# Altium PCB PCB_MyFirstCPU_2022-09-18.pcbdoc (part 1 of 2)
Units mil, origin at the board's own origin, x right, y up, seen from the top; angles counter-clockwise.
Board outline 4755 x 3745 mil, 2 copper layers (Top Layer, Bottom Layer); 117 components, 142 nets, 496 pads, 228 vias.
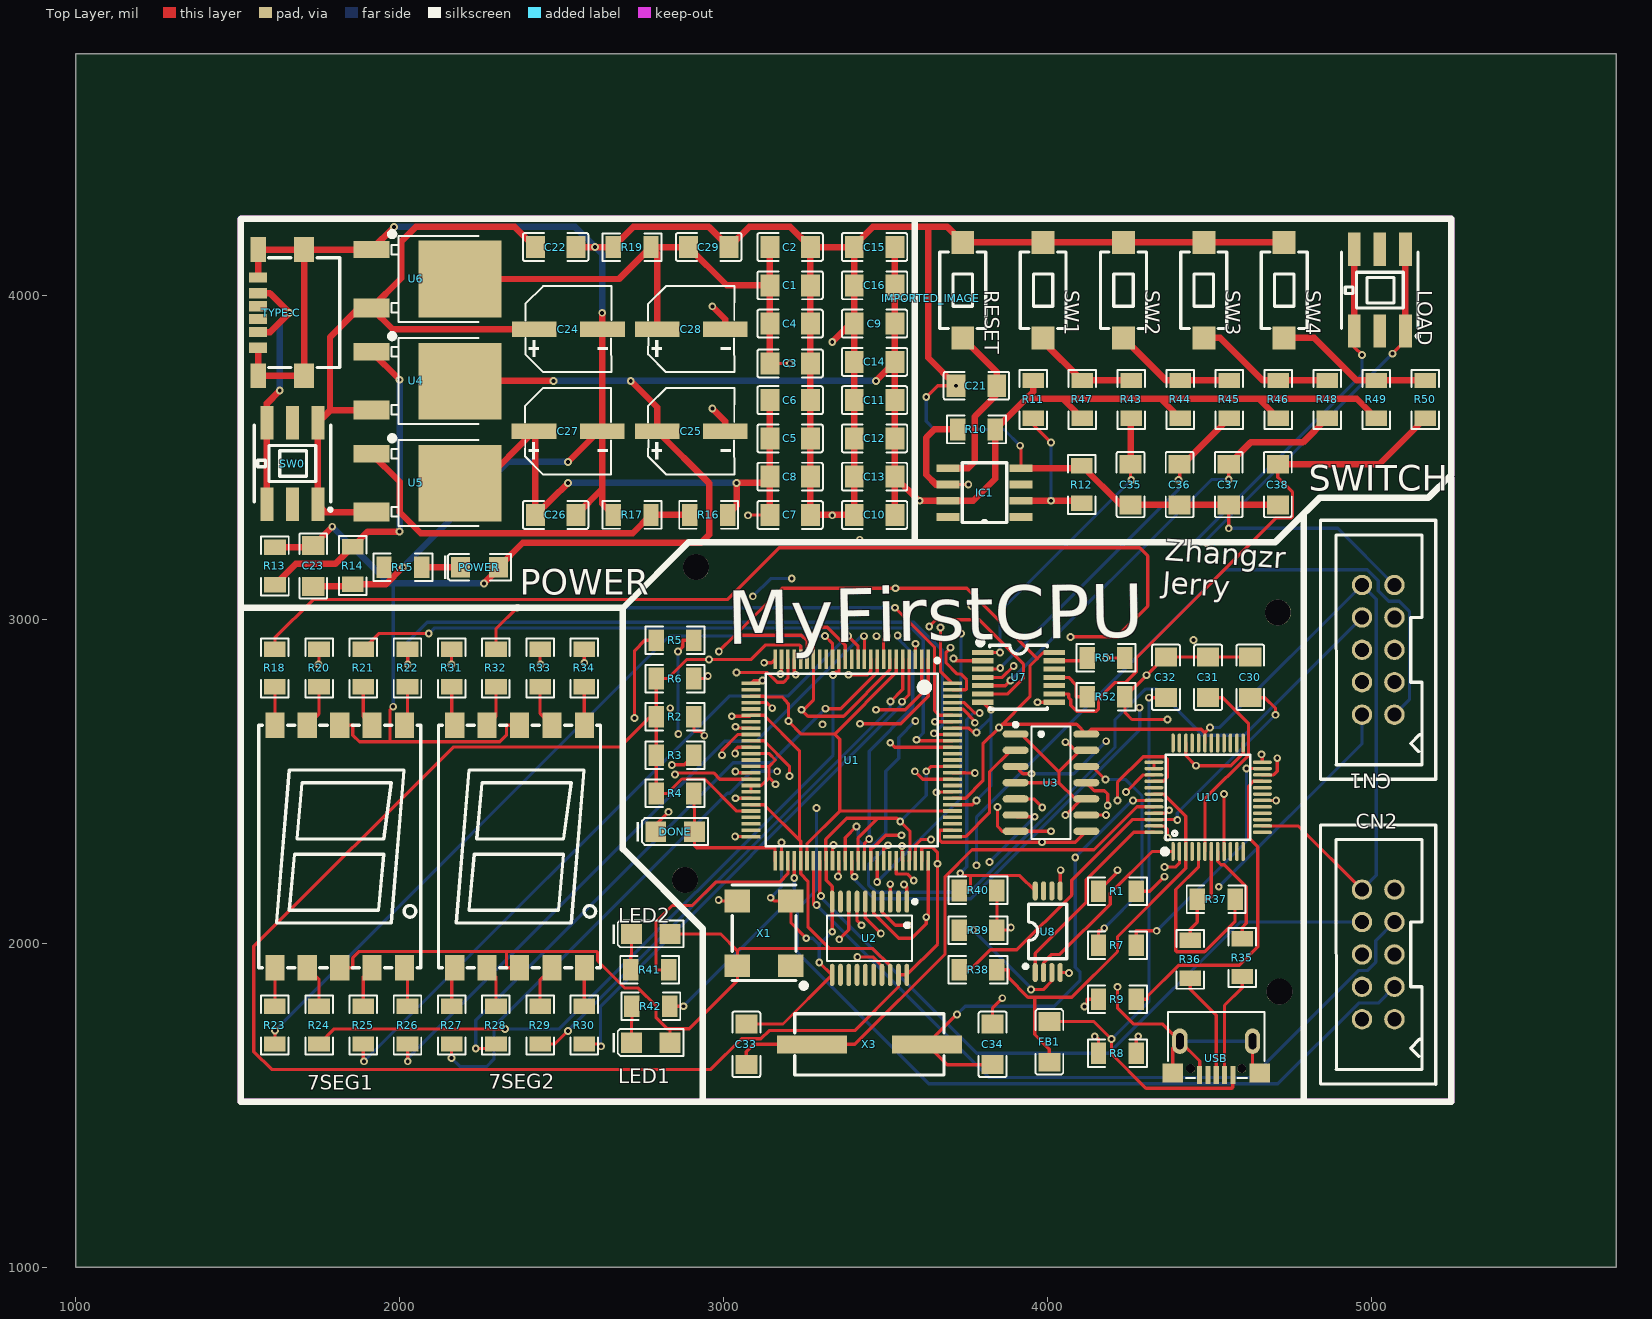
[diagram p0: Top Layer view]
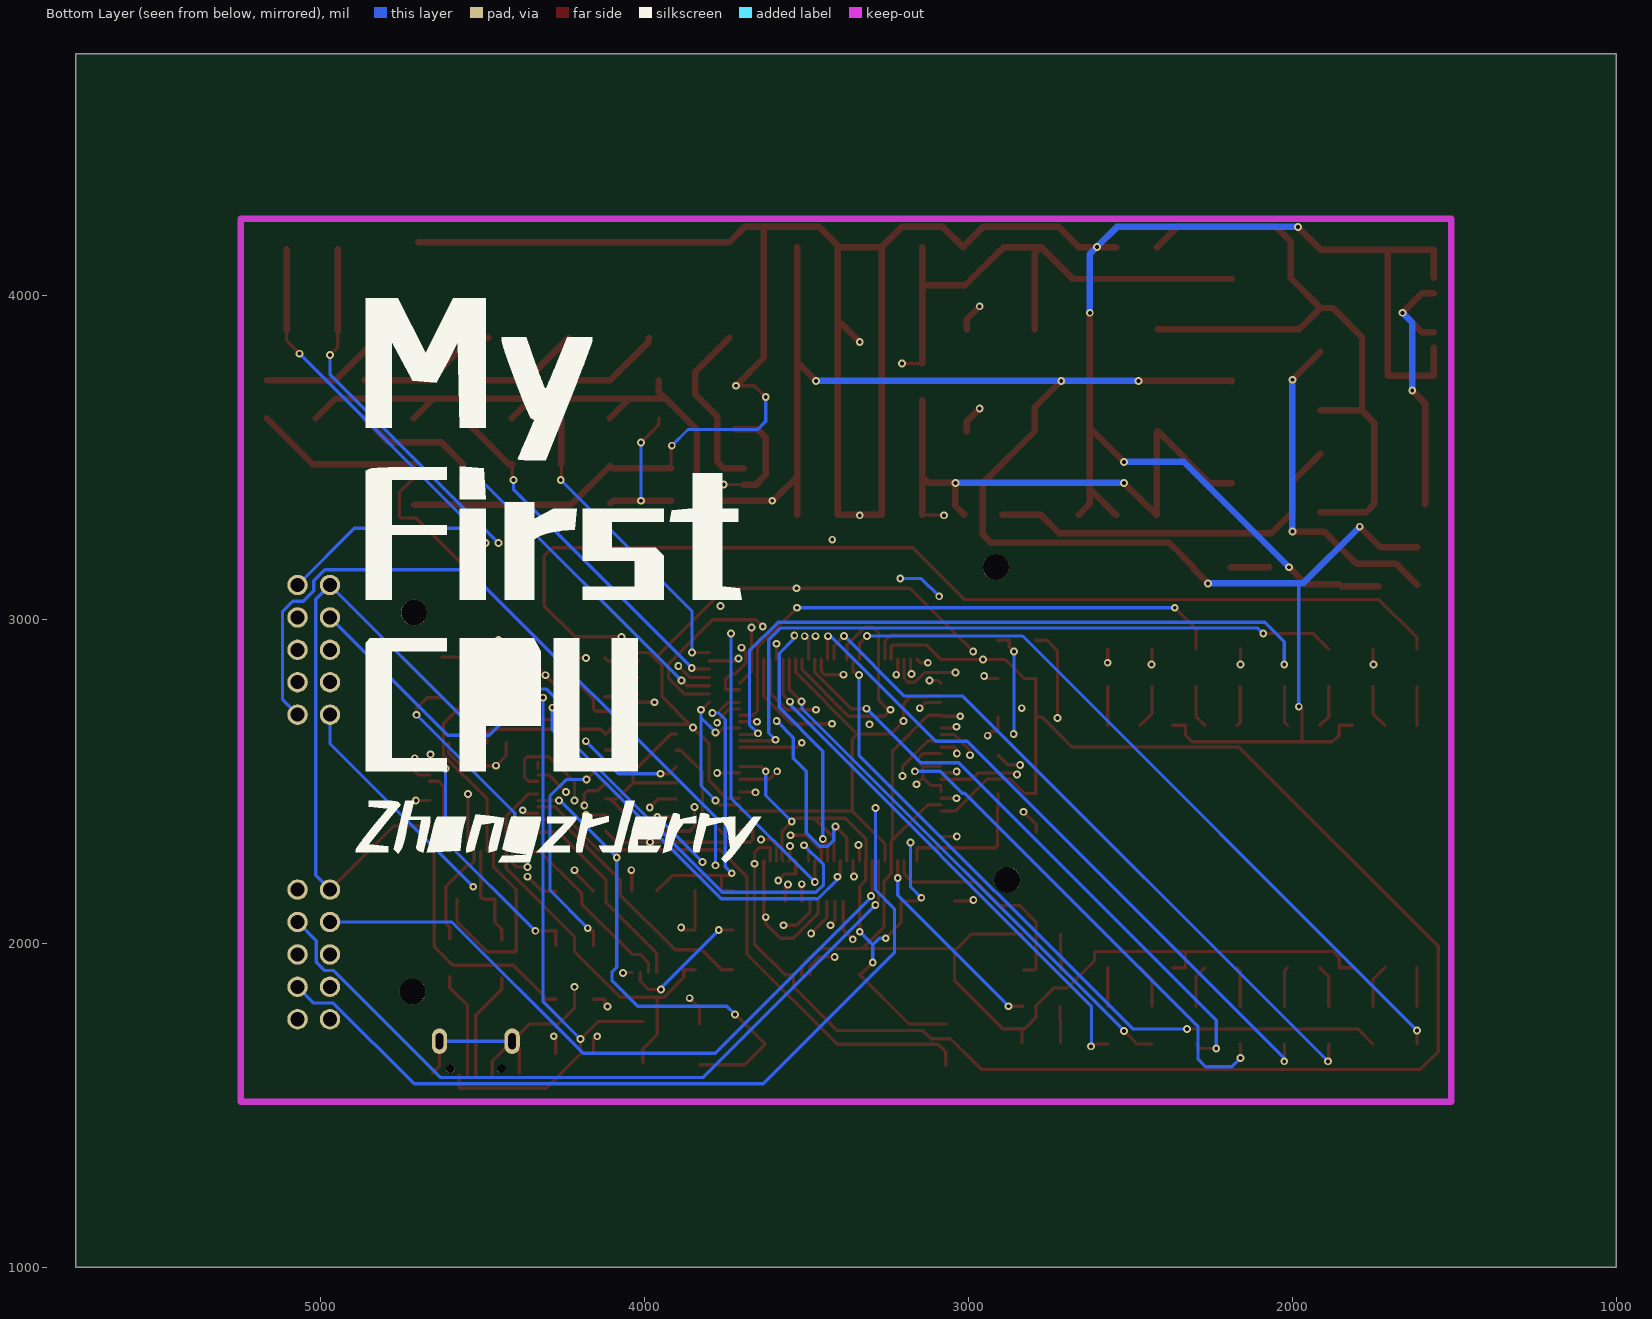
[diagram p1: Bottom Layer view, seen from below]

## Layer stack, top to bottom
Top Layer: signal copper (thickness not stored)
Dielectric: dielectric 12.6, FR-4, Dk 4.8
Bottom Layer: signal copper (thickness not stored)

## Board outline
5755,1000 1000,1000 1000,4745 5755,4745

## Components (designator, comment, footprint, x,y, rotation, side; value= is the part's Value field where it differs from the comment)
7SEG1 "SLS0561FR1A1BD" LED-SEG-SMD_SLS0561FR1A1BD 1815,2297.97 r0 top
7SEG2 "SLS0561FR1A1BD" LED-SEG-SMD_SLS0561FR1A1BD 2370,2297.95 r0 top
C1 "100nF" C1206 3205,4029.88 r180 top
C2 "100nF" C1206 3205,4147.99 r180 top
C3 "100nF" C1206 3205,3788.66 r180 top
C4 "100nF" C1206 3205,3911.77 r180 top
C5 "100nF" C1206 3205,3557.44 r180 top
C6 "100nF" C1206 3205,3675.55 r180 top
C7 "100nF" C1206 3205,3321.22 r180 top
C8 "100nF" C1206 3205,3439.33 r180 top
C9 "100nF" C1206 3465.63,3911.76 r0 top
C10 "100nF" C1206 3465.63,3321.21 r0 top
C11 "100nF" C1206 3465.63,3675.54 r0 top
C12 "100nF" C1206 3465.63,3557.43 r0 top
C13 "100nF" C1206 3465.63,3439.32 r0 top
C14 "100nF" C1206 3465.63,3793.65 r0 top
C15 "100nF" C1206 3465.63,4147.98 r0 top
C16 "100nF" C1206 3465.63,4029.87 r0 top
C21 "1uF" C1206 3780,3720 r0 top
C22 "100nF" C1206 2481.38,4147.99 r180 top
C23 "100nF" C1206 1733.35,3163.74 r90 top
C24 "100uF" CAP-SMD_BD6.3-L6.6-W6.6-LS7.2-FD 2520.75,3894.61 r0 top
C25 "100uF" CAP-SMD_BD6.3-L6.6-W6.6-LS7.2-FD 2900,3579.64 r0 top
C26 "100nF" C1206 2481.38,3321.22 r180 top
C27 "100uF" CAP-SMD_BD6.3-L6.6-W6.6-LS7.2-FD 2520,3579.64 r0 top
C28 "100uF" CAP-SMD_BD6.3-L6.6-W6.6-LS7.2-FD 2900,3894.61 r0 top
C29 "100nF" C1206 2953.82,4147.99 r180 top
C30 "100nF" C1206 4625,2820 r90 top
C31 "33nF" C1206 4495,2820 r270 top
C32 "10nF" C1206 4365,2820 r270 top
C33 "20pF" C1206 3070,1687.5 r270 top
C34 "20pF" C1206 3830,1687.5 r270 top
C35 "1uF" C1206 4255.85,3415 r90 top
C36 "1uF" C1206 4407.23,3415 r90 top
C37 "1uF" C1206 4558.61,3415 r90 top
C38 "1uF" C1206 4710,3415 r90 top
CN1 "Z-231011810106" IDC-TH_Z-231011810106 5020,2905 r90 top
CN2 "Z-231011810106" IDC-TH_Z-231011810106 5020,1965 r90 top
DONE "TZ-P2-1206YTCS2-0.9T" LED1206-RD_YELLOW-1 2850,2343.78 r0 top
FB1 "PZ3216U601-1R5TF" L1206 4005,1695 r270 top
IC1 "UNIT_M51957B" SMD_SOP8 3805,3390 r180 top
IMPORTED_IMAGE "IMPORTED_IMAGE" IMPORTED_IMAGE 3638.72,3990 r0 top
LED1 "E6C1206CWAY1UDA" LED1206-RD_WHITE 2775,1693.06 r0 top
LED2 "E6C1206CWAY1UDA" LED1206-RD_WHITE 2775,2028.06 r0 top
LOAD "XKB5858-Z-TP" SW-SMD_6P-L5.8-W5.8-P2.00-LS8.3 5025,4015 r270 top
POWER "E6C1206QBAC1UDA" LED1206-R-RD 2246.22,3160 r0 top
R1 "4.7kΩ" R1206 4215,2160 r0 top
R2 "4.7kΩ" R1206 2850,2698.11 r180 top
R3 "4.7kΩ" R1206 2850,2580 r180 top
R4 "330Ω" R1206 2850,2461.89 r0 top
R5 "100Ω" R1206 2850,2934.33 r0 top
R6 "4.7kΩ" R1206 2850,2816.22 r180 top
R7 "100Ω" R1206 4215,1993.33 r0 top
R8 "100Ω" R1206 4215,1660 r0 top
R9 "100Ω" R1206 4215,1826.67 r180 top
R10 "1kΩ" R1206 3780,3585 r0 top
R11 "10kΩ" R1206 3955,3677.99 r90 top
R12 "7.5kΩ" R1206 4105,3415 r270 top
R13 "240Ω" R1206 1615.24,3163.74 r270 top
R14 "390Ω" R1206 1855,3165 r90 top
R15 "330Ω" R1206 2010,3160 r0 top
R16 "240Ω" R1206 2953.82,3321.22 r180 top
R17 "240Ω" R1206 2717.6,3321.22 r0 top
R18 "100Ω" R1206 1615,2849.14 r90 top
R19 "240Ω" R1206 2717.6,4147.99 r180 top
R20 "100Ω" R1206 1751.43,2849.14 r90 top
R21 "100Ω" R1206 1887.86,2849.14 r90 top
R22 "100Ω" R1206 2024.29,2849.14 r90 top
R23 "100Ω" R1206 1615,1746.78 r90 top
R24 "100Ω" R1206 1751.43,1746.78 r90 top
R25 "100Ω" R1206 1887.86,1746.78 r90 top
R26 "100Ω" R1206 2024.29,1746.78 r90 top
R27 "100Ω" R1206 2160.71,1746.78 r90 top
R28 "100Ω" R1206 2297.14,1746.78 r90 top
R29 "100Ω" R1206 2433.57,1746.78 r90 top
R30 "100Ω" R1206 2570,1746.78 r90 top
R31 "100Ω" R1206 2160.71,2849.14 r90 top
R32 "100Ω" R1206 2297.14,2849.14 r90 top
R33 "100Ω" R1206 2433.57,2849.14 r90 top
R34 "100Ω" R1206 2570,2849.14 r90 top
R35 "33Ω" R1206 4600,1955 r90 top
R36 "33Ω" R1206 4440,1950 r90 top
R37 "1.5kΩ" R1206 4520,2135 r0 top
R38 "470Ω" R1206 3785,1917.5 r180 top
R39 "2.2kΩ" R1206 3785,2040 r180 top
R40 "10kΩ" R1206 3785,2162.5 r180 top
R41 "330Ω" R1206 2771.81,1917.3 r0 top
R42 "330Ω" R1206 2775,1805 r0 top
R43 "100Ω" R1206 4257.5,3677.99 r270 top
R44 "2.2kΩ" R1206 4408.75,3677.99 r270 top
R45 "100Ω" R1206 4560,3677.99 r270 top
R46 "2.2kΩ" R1206 4711.25,3677.99 r270 top
R47 "2.2kΩ" R1206 4106.25,3677.99 r270 top
R48 "100Ω" R1206 4862.5,3677.99 r270 top
R49 "2.2kΩ" R1206 5013.75,3677.99 r270 top
R50 "100Ω" R1206 5165,3677.99 r90 top
R51 "2.2kΩ" R1206 4180,2880 r180 top
R52 "2.2kΩ" R1206 4180,2760 r180 top
RESET "TC" KEY-SMD_L6.0-W3.6-LS8.3-L 3737.79,4015 r90 top
SW0 "XKB5858-Z-TP" SW-SMD_6P-L5.8-W5.8-P2.00-LS8.3 1669.13,3480 r270 top
SW1 "TC" KEY-SMD_L6.0-W3.6-LS8.3-L 3985.79,4015 r270 top
SW2 "TC" KEY-SMD_L6.0-W3.6-LS8.3-L 4233.78,4015 r270 top
SW3 "TC" KEY-SMD_L6.0-W3.6-LS8.3-L 4481.77,4015 r270 top
SW4 "TC" KEY-SMD_L6.0-W3.6-LS8.3-L 4729.76,4015 r90 top
TYPE-C "TYPEC-249D-BRP6" USB-C-SMD_XUNPU_TYPEC-249D-BRP6 1634.13,3945.43 r90 top
U1 "XC3S250E-4VQG100I" QFP-100_L14.0-W14.0-P0.50-LS16.0-BL 3395,2565 r180 top
U2 "XCF02SVOG20C" TSSOP-20_L6.5-W4.4-P0.65-LS6.4-BL 3450,2015 r180 top
U3 "MC74AC125DR2G" SOIC-14_L8.7-W3.9-P1.27-LS6.0-BL 4010,2495 r270 top
U4 "LM317AG-TN3-R" TO-252-2_L6.5-W6.1-P4.58-LS10.0-TL 2050,3735.04 r0 top
U5 "LM317AG-TN3-R" TO-252-2_L6.5-W6.1-P4.58-LS10.0-TL 2050,3420.08 r0 top
U6 "LM317AG-TN3-R" TO-252-2_L6.5-W6.1-P4.58-LS10.0-TL 2050,4050 r0 top
U7 "74VHC14FT" TSSOP-14_L5.0-W4.4-P0.65-LS6.4-BL 3910,2820 r270 top
U8 "AT93C46E-TH-T" TSSOP-8_L4.4-W3.0-P0.65-LS6.4-BL-2 4000,2035 r0 top
U10 "FT2232D" LQFP-48_L7.0-W7.0-P0.50-LS9.0-BL 4495,2450 r0 top
USB "U254-051N-4BH83-F1B" MICRO-USB-SMD_U254-051N-4BH83-F1B 4520,1645 r180 top
X1 "10MHz" OSC-SMD_4P-L7.0-W5.0-BL_SG7050 3125,2030 r90 top
X3 "-" CRYSTAL-SMD_L11.4-W4.8-LS12.7 3450,1687.5 r180 top

## Footprints (in the part's own frame and the unit in brackets; to place one, negate y for a bottom-side part, rotate by r counter-clockwise, add the part's x,y. Pads: shape width x height; smd on the part's side, far side on the other; paste and mask are expansions set on the pad)
C1206 [mm]
  rect 1.485x1.728 smd: 1(-1.593,0) 2(1.593,0)
  silkscreen extent -2.56,-1.09 2.56,1.09
CAP-SMD_BD6.3-L6.6-W6.6-LS7.2-FD [mm]
  rect 3.5x1.2 smd: 1(-2.67,0) 2(2.67,0)
  silkscreen extent -3.38,-3.38 3.38,3.38
CRYSTAL-SMD_L11.4-W4.8-LS12.7 [mm]
  rect 5.5x1.4 smd: 1(-4.5,0) 2(4.5,0)
  silkscreen extent -5.85,-2.4 5.85,2.4
IDC-TH_Z-231011810106 [mm]
  round 1.6 hole 1.1: 1(-5.08,-1.27) 2(-5.08,1.27) 3(-2.54,-1.27) 4(-2.54,1.27) 5(0,-1.27) 6(0,1.27) 7(2.54,-1.27) 8(2.54,1.27) 9(5.08,-1.27) 10(5.08,1.27)
  silkscreen extent -10.17,-4.5 10.15,4.52
IMPORTED_IMAGE [mil]
KEY-SMD_L6.0-W3.6-LS8.3-L [mm]
  rect 1.8x1.8 smd: 1(-3.75,0) 2(3.75,0)
  silkscreen extent -3,-1.8 3,1.8
L1206 [mm]
  rect 1.485x1.728 smd: 1(-1.593,0) 2(1.593,0)
  silkscreen extent -2.56,-1.09 2.56,1.09
LED1206-R-RD [mm]
  rect 1.485x1.62 smd: 1(1.493,0) 2(-1.492,0)
  silkscreen extent -2.77,-1.04 2.46,1.04
LED1206-RD_WHITE [mm]
  rect 1.635x1.6 smd: 1(-1.517,0) 2(1.517,0)
  silkscreen extent -2.99,-1.04 2.57,1.07
LED1206-RD_YELLOW-1 [mm]
  rect 1.635x1.6 smd: 1(-1.517,0) 2(1.517,0)
  silkscreen extent -2.99,-1.04 2.57,1.07
LED-SEG-SMD_SLS0561FR1A1BD [mm]
  rect 1.5x2 smd: 1(-5.08,-9.5) 2(-2.54,-9.5) 3(0,-9.5) 4(2.54,-9.5) 5(5.08,-9.5) 6(5.08,9.5) 7(2.54,9.5) 8(0,9.5) 9(-2.54,9.5) 10(-5.08,9.5)
  silkscreen extent -6.35,-9.5 6.35,9.5
LQFP-48_L7.0-W7.0-P0.50-LS9.0-BL [mm]
  oval 0.27x1.5 smd: 1(-2.75,-4.25) 2(-2.25,-4.25) 3(-1.75,-4.25) 4(-1.25,-4.25) 5(-0.75,-4.25) 6(-0.25,-4.25) 7(0.25,-4.25) 8(0.75,-4.25) 9(1.25,-4.25) 10(1.75,-4.25) 11(2.25,-4.25) 12(2.75,-4.25) 25(2.75,4.25) 26(2.25,4.25) 27(1.75,4.25) 28(1.25,4.25) 29(0.75,4.25) 30(0.25,4.25) 31(-0.25,4.25) 32(-0.75,4.25) 33(-1.25,4.25) 34(-1.75,4.25) 35(-2.25,4.25) 36(-2.75,4.25)
  oval 1.5x0.27 smd: 13(4.25,-2.75) 14(4.25,-2.25) 15(4.25,-1.75) 16(4.25,-1.25) 17(4.25,-0.75) 18(4.25,-0.25) 19(4.25,0.25) 20(4.25,0.75) 21(4.25,1.25) 22(4.25,1.75) 23(4.25,2.25) 24(4.25,2.75) 37(-4.25,2.75) 38(-4.25,2.25) 39(-4.25,1.75) 40(-4.25,1.25) 41(-4.25,0.75) 42(-4.25,0.25) 43(-4.25,-0.25) 44(-4.25,-0.75) 45(-4.25,-1.25) 46(-4.25,-1.75) 47(-4.25,-2.25) 48(-4.25,-2.75)
  silkscreen extent -3.59,-4.46 3.3,3.34
MICRO-USB-SMD_U254-051N-4BH83-F1B [mm]
  rect 1.6x1.5 smd: 0(-3.4,1.175) 0(3.4,1.175)
  oval 1.2x2 hole 0.6 slot 1.25 at 90 deg: 0(-2.85,-1.325) 0(2.85,-1.325)
  rect 0.4x1.4 smd: 1(-1.3,1.325) 2(-0.65,1.325) 3(0,1.325) 4(0.65,1.325) 5(1.3,1.325)
  round 0.7 hole 0.7 unplated: ""(-2,0.825) ""(2,0.825)
  silkscreen extent -3.8,-3.61 3.79,1.57
OSC-SMD_4P-L7.0-W5.0-BL_SG7050 [mm]
  rect 1.8x2 smd: 1(-2.54,-2.1) 2(2.54,-2.1) 3(2.54,2.1) 4(-2.54,2.1)
  silkscreen extent -4.3,-3.3 3.8,2.5
QFP-100_L14.0-W14.0-P0.50-LS16.0-BL [mm]
  rect 0.28x1.5 smd: 1(-6,-7.9) 2(-5.5,-7.9) 3(-5,-7.9) 4(-4.5,-7.9) 5(-4,-7.9) 6(-3.5,-7.9) 7(-3,-7.9) 8(-2.5,-7.9) 9(-2,-7.9) 10(-1.5,-7.9) 11(-1,-7.9) 12(-0.5,-7.9) 13(0,-7.9) 14(0.5,-7.9) 15(1,-7.9) 16(1.5,-7.9) 17(2,-7.9) 18(2.5,-7.9) 19(3,-7.9) 20(3.5,-7.9) 21(4,-7.9) 22(4.5,-7.9) 23(5,-7.9) 24(5.5,-7.9) 25(6,-7.9) 51(6,7.9) 52(5.5,7.9) 53(5,7.9) 54(4.5,7.9) 55(4,7.9) 56(3.5,7.9) 57(3,7.9) 58(2.5,7.9) 59(2,7.9) 60(1.5,7.9) 61(1,7.9) 62(0.5,7.9) 63(0,7.9) 64(-0.5,7.9) 65(-1,7.9) 66(-1.5,7.9) 67(-2,7.9) 68(-2.5,7.9) 69(-3,7.9) 70(-3.5,7.9) 71(-4,7.9) 72(-4.5,7.9) 73(-5,7.9) 74(-5.5,7.9) 75(-6,7.9)
  rect 1.5x0.28 smd: 26(7.9,-6) 27(7.9,-5.5) 28(7.9,-5) 29(7.9,-4.5) 30(7.9,-4) 31(7.9,-3.5) 32(7.9,-3) 33(7.9,-2.5) 34(7.9,-2) 35(7.9,-1.5) 36(7.9,-1) 37(7.9,-0.5) 38(7.9,0) 39(7.9,0.5) 40(7.9,1) 41(7.9,1.5) 42(7.9,2) 43(7.9,2.5) 44(7.9,3) 45(7.9,3.5) 46(7.9,4) 47(7.9,4.5) 48(7.9,5) 49(7.9,5.5) 50(7.9,6) 76(-7.9,6) 77(-7.9,5.5) 78(-7.9,5) 79(-7.9,4.5) 80(-7.9,4) 81(-7.9,3.5) 82(-7.9,3) 83(-7.9,2.5) 84(-7.9,2) 85(-7.9,1.5) 86(-7.9,1) 87(-7.9,0.5) 88(-7.9,0) 89(-7.9,-0.5) 90(-7.9,-1) 91(-7.9,-1.5) 92(-7.9,-2) 93(-7.9,-2.5) 94(-7.9,-3) 95(-7.9,-3.5) 96(-7.9,-4) 97(-7.9,-4.5) 98(-7.9,-5) 99(-7.9,-5.5) 100(-7.9,-6)
  silkscreen extent -6.85,-7.95 6.75,6.75
R1206 [mil]
  rect 47.54x66.97 smd: 1(-58.22,0) 2(58.22,0)
  silkscreen extent -91,-42 91,42
SMD_SOP8 [mil]
  rect 70.87x23.62 smd: 1(-112.2,75) 2(-112.2,25) 3(-112.2,-25) 4(-112.2,-75) 5(112.2,-75) 6(112.2,-25) 7(112.2,25) 8(112.2,75)
  silkscreen extent -69,-92 69,92
SOIC-14_L8.7-W3.9-P1.27-LS6.0-BL [mil]
  oval 22.6x80.24 smd: 1(-150,-109.02) 2(-100,-109.02) 3(-50,-109.02) 4(0,-109.02) 5(50,-109.02) 6(100,-109.02) 7(150,-109.02) 8(150,109.02) 9(100,109.02) 10(50,109.02) 11(0,109.02) 12(-50,109.02) 13(-100,109.02) 14(-150,109.02)
  silkscreen extent -185,-115 173,60
SW-SMD_6P-L5.8-W5.8-P2.00-LS8.3 [mm]
  rect 2.6x1 smd: 1(3.2,2) 2(3.2,0) 3(3.2,-2) 4(-3.2,2) 5(-3.2,0) 6(-3.2,-2)
  silkscreen extent -3,-3 3.74,3.11
TO-252-2_L6.5-W6.1-P4.58-LS10.0-TL [mm]
  rect 2.8x1.35 smd: 1(-3.475,2.29)
  rect 2.8x1.5 smd: 3(-3.475,-2.29)
  rect 6.5x6 smd: 4(3.475,-0.017)
  silkscreen extent -2.06,-3.39 4.9,3.7
TSSOP-8_L4.4-W3.0-P0.65-LS6.4-BL-2 [mm]
  oval 0.4x1.5 smd: 1(-0.975,-3.2) 2(-0.325,-3.2) 3(0.325,-3.2) 4(0.975,-3.2) 5(0.975,3.2) 6(0.325,3.2) 7(-0.325,3.2) 8(-0.975,3.2)
  silkscreen extent -1.89,-2.87 1.5,2.16
TSSOP-14_L5.0-W4.4-P0.65-LS6.4-BL [mm]
  rect 0.4x1.7 smd: 1(-1.95,-2.8) 2(-1.3,-2.8) 3(-0.65,-2.8) 4(0,-2.8) 5(0.65,-2.8) 6(1.3,-2.8) 7(1.95,-2.8) 8(1.95,2.8) 9(1.3,2.8) 10(0.65,2.8) 11(0,2.8) 12(-0.65,2.8) 13(-1.3,2.8) 14(-1.95,2.8)
  silkscreen extent -2.95,-3.2 2.5,2.25
TSSOP-20_L6.5-W4.4-P0.65-LS6.4-BL [mm]
  oval 0.364x1.742 smd: 1(-2.925,-2.871) 2(-2.275,-2.871) 3(-1.625,-2.871) 4(-0.975,-2.871) 5(-0.325,-2.871) 6(0.325,-2.871) 7(0.975,-2.871) 8(1.625,-2.871) 9(2.275,-2.871) 10(2.925,-2.871) 11(2.925,2.871) 12(2.275,2.871) 13(1.625,2.871) 14(0.975,2.871) 15(0.325,2.871) 16(-0.325,2.871) 17(-0.975,2.871) 18(-1.625,2.871) 19(-2.275,2.871) 20(-2.925,2.871)
  silkscreen extent -3.71,-3.02 3.33,1.77
USB-C-SMD_XUNPU_TYPEC-249D-BRP6 [mm]
  rect 1.95x1.2 smd: 7(4.945,1.8) 10(-4.945,1.8)
  rect 1.95x1.6 smd: 8(4.945,-1.8) 9(-4.945,-1.8)
  rect 0.8x1.4 smd: A5(-0.5,1.8) A9(1.52,1.8) A12(2.75,1.8) B5(0.5,1.8) B9(-1.52,1.8) B12(-2.75,1.8)
  silkscreen extent -4.3,-4.6 4.3,0.97

## Free pads (board coordinates)
  round 80 hole 80 unplated: ""(2880,2195) ""(2915,3160) ""(4710,3020) ""(4715,1850)

## Via types
v1: diameter 24, hole 12, Top Layer to Bottom Layer, tented both sides, 228 vias

## Nets (pads, with @x,y where several pads share a name; then routed paths per layer and width w, separated by ;. In a path a pad name is that pad's centre, name@x,y a point inside that pad or via, vN(x,y) a via of type N, cw(c..) or ccw(c..) an arc to the next point about the centre after c; other vN are vias at no path point)
7SEG_1_1: R23.1 U1.16 | length 2324.8
  Top Layer w10: R23.1@1615,1688.56 1615,1723.34 v1(1615,1730) ; v1(3312.7,2947.65) 3335.94,2924.41 U1.16@3335.94,2876.02
  Bottom Layer w10: v1(1615,1730) 2832.65,2947.65 v1(3312.7,2947.65)
7SEG_1_2: R24.1 U1.15 | length 2264.3
  Top Layer w10: R24.1@1751.43,1688.56 1797.87,1735 v1(2325,1735) ; v1(3337.62,2826.99) 3346.11,2835.48 3355.63,2835.48 U1.15@3355.63,2876.02
  Bottom Layer w10: v1(2325,1735) 2492.35,1735 3337.62,2580.27 v1(3337.62,2826.99)
7SEG_1_4: R25.1 U1.12 | length 2176.5
  Top Layer w10: R25.1@1887.86,1688.56 1887.86,1637.14 v1(1890,1635) ; v1(3383.33,2947.92) 3414.69,2916.56 U1.12@3414.69,2876.02
  Bottom Layer w10: v1(1890,1635) 3017.32,2762.32 3197.73,2762.32 v1(3383.33,2947.92)
7SEG_1_5: R26.1 U1.11 | length 2082.7
  Top Layer w10: R26.1@2024.29,1688.56 v1(2025,1635) ; v1(3433.12,2947.09) 3434.37,2945.84 U1.11@3434.37,2876.02
  Bottom Layer w10: v1(2025,1635) 2025,1645 3002.7,2622.7 3100.7,2622.7 3172.9,2694.9 ; 3172.85,2694.9 3425.04,2947.09 v1(3433.12,2947.09)
7SEG_1_6: R22.2 U1.92 | length 2153.5
  Top Layer w10: R22.2@2024.29,2907.35 2025,2906.64 v1(2025,2860) ; v1(3649.07,2647.31) 3652.64,2643.74 U1.92@3706.02,2643.74
  Bottom Layer w10: v1(2025,2860) 2025,2930 2085,2990 3587.2,2990 3675.7,2901.5 3675.7,2674 v1(3649.07,2647.31)
7SEG_1_7: R21.2 U1.91 | length 2199.6
  Top Layer w10: R21.2@1887.86,2907.35 1935.5,2955 v1(2090,2955) ; v1(3595.11,2627.42) 3598.48,2624.05 U1.91@3706.02,2624.05
  Bottom Layer w10: v1(2090,2955) 2107.14,2972.14 3579.97,2972.14 3616.04,2936.07 3616.04,2648.35 v1(3595.11,2627.42)
7SEG_1_9: R20.2 U1.90 | length 2109.9
  Top Layer w10: v1(1750,2860) 1751.43,2861.43 R20.2@1751.43,2907.35 ; v1(3513.99,2618.19) 3527.81,2604.37 U1.90@3706.02,2604.36
  Mid-Layer 1 w10: v1(1750,2860) 1857.3,2752.7 3379.48,2752.7 v1(3513.99,2618.19)
7SEG_1_10: R18.2 U1.86 | length 3915.5
  Top Layer w10: R18.2@1615,2907.35 1615,2942.14 ; 1615,2942.1 1732.9,3060 3011.2,3060 3171,3219.9 4283.4,3219.9 4308.6,3194.7 4308.6,3040 4213.6,2945 v1(4070,2945) ; U1.86@3706.02,2525.63 3746.56,2525.63 ; 3746.6,2525.6 3747.2,2525 v1(3775,2525)
  Mid-Layer 2 w10: v1(3775,2525) 3805,2525 4070,2790 v1(4070,2945)
7SEG_2_1: R27.1 U1.10 | length 1996.3
  Top Layer w10: v1(2160,1645) 2160,1683.29 R27.1@2160.71,1688.56 ; v1(3384.82,2828.29) 3443.84,2828.29 3454.05,2838.5 U1.10@3454.05,2876.02
  Mid-Layer 2 w10: v1(3165,2530) 3165,2608.47 v1(3384.82,2828.29)
  Bottom Layer w10: v1(2160,1645) 2186.57,1618.43 2268.01,1618.43 2291.01,1641.43 2291.01,1741.76 3011.56,2462.31 3018.68,2462.31 3086.37,2530 v1(3165,2530)
7SEG_2_2: R28.1 U1.9 | length 1878.6
  Top Layer w10: v1(2235,1675) 2283.6,1675 R28.1@2297.14,1688.56 ; v1(3314,2723.34) 3361.6,2723.34 3473.74,2835.48 U1.9@3473.74,2876.02
  Bottom Layer w10: v1(2235,1675) 2235,1761.88 3029.91,2556.79 3147.45,2556.79 v1(3314,2723.34)
7SEG_2_4: R29.1 U1.5 | length 1677.7
  Top Layer w10: R29.1@2433.57,1688.56 2479.28,1688.56 v1(2519.39,1728.66) ; v1(3514.94,2745.45) 3552.48,2782.99 U1.5@3552.48,2876.02
  Bottom Layer w10: v1@2517.75,1727.25 3513.3,2722.8 v1@3513.3,2744.04
7SEG_2_5: R30.1 U1.4 | length 1645
  Top Layer w10: R30.1@2570,1688.56 2614.49,1688.56 v1(2621.64,1681.41) ; v1(3550,2745) 3572.16,2767.16 U1.4@3572.17,2876.02
  Bottom Layer w10: v1@2620,1680 2620,1805 3550,2735 v1(3550,2745)
7SEG_2_6: R34.2 U1.2 | length 1319.5
  Top Layer w10: v1(2570,2865) R34.2@2570,2907.35 ; v1(3470,2720) 3560,2720 3571.36,2731.36 3611.53,2771.53 U1.2@3611.54,2876.02
  Mid-Layer 1 w10: v1(2835,2725) 3075,2725 3140,2660 3290,2660 v1(3305,2675)
  Mid-Layer 2 w10: v1(2570,2865) 2710,2725 v1(2835,2725) ; v1(3305,2675) 3350,2720 v1(3470,2720)
7SEG_2_7: R33.2 U1.3 | length 1279.1
  Top Layer w10: R33.2@2433.57,2907.35 2433.57,2861.43 v1(2435,2860) ; U1.3@3591.85,2876.02 v1(3591.85,2923.84)
  Mid-Layer 1 w10: v1(2435,2860) 2498.84,2923.84 v1@3591.85,2923.84
7SEG_2_9: R32.2 U1.95 | length 1750.1
  Top Layer w10: R32.2@2297.14,2907.35 2297.14,2969.24 v1(2362.9,3035) ; v1(3528.8,3035) 3650.7,2913.1 3650.7,2717.6 3665.5,2702.8 U1.95@3706.02,2702.8
  Bottom Layer w10: v1(2362.9,3035) v1(3528.8,3035)
7SEG_2_10: R31.2 U1.94 | length 1666.9
  Top Layer w10: v1(2160,2860) 2160,2906.64 R31.2@2160.71,2907.35 ; v1(3652.08,2683.11) U1.94@3706.02,2683.11
  Mid-Layer 1 w10: v1(2160,2860) 2250.8,2769.2 3565.99,2769.2 v1(3652.08,2683.11)
CLOCK: R5.2 U1.83 | length 1251.4
  Top Layer w10: v1(2859.13,2899.91) 2873.44,2914.22 2873.44,2934.33 R5.2@2908.22,2934.33 ; v1(3656.76,2465.28) 3664.18,2465.28 3665.48,2466.58 U1.83@3706.02,2466.57
  Mid-Layer 1 w10: v1(2860,2645) 2996.59,2508.41 3018.69,2508.41 3061.82,2465.28 v1(3656.76,2465.28)
  Bottom Layer w10: v1(2859.13,2899.91) 2859.13,2645.87 v1(2860,2645)
FB1_1: C32.2 FB1.1 USB.1 | length 1871.7
  Top Layer w10: FB1.1@4005,1757.7 4142.86,1757.7 v1(4196.79,1703.77) 4196.79,1658.27 4303.09,1551.97 4568.89,1551.97 4571.19,1554.27 USB.1@4571.19,1592.83 ; v1(4312.17,2757.3) C32.2@4365,2757.3
  Bottom Layer w10: v1(4196.79,1703.77) 4312.17,1819.15 v1(4312.17,2757.3)
GND: C1.1 C2.1 C3.1 C4.1 C5.1 C6.1 C7.1 C8.1 C9.1 C10.1 C11.1 C12.1 C13.1 C14.1 C15.1 C16.1 C21.1 C22.1 C23.1 C24.2 C25.2 C26.1 C27.2 C28.2 C29.1 C30.2 C31.1 C32.1 C33.1 C34.1 C35.1 C36.1 C37.1 C38.1 CN1.9 CN2.9 DONE.1 IC1.4 R1.1 R12.1 R14.1 R15.1 R17.1 R19.2 R51.1 R52.1 RESET.2 SW1.1 SW2.1 SW3.1 SW4.2 TYPE-C.7 TYPE-C.8 TYPE-C.9 TYPE-C.10 TYPE-C.A12 TYPE-C.B12 U1.7 U1.14 U1.19 U1.29 U1.37 U1.39 U1.42 U1.43 U1.52 U1.59 U1.64 U1.72 U1.81 U1.87 U1.93 U2.10 U2.11 U3.7 U6.1 U7.7 U8.5 U10.9 U10.18 U10.25 U10.34 U10.45 U10.47 USB.0 USB.5 X1.2 | length 22761
  Top Layer w10: DONE.1@2790.25,2343.78 2790.26,2365.26 v1(2830,2405) ; C33.1@3070,1750.2 3183.07,1750.2 U2.11@3334.84,1901.97 3333.03,1901.97 v1(3295,1940) ; U1.43@3083.98,2466.57 U1.42@3083.98,2486.26 3116.26,2486.26 3140,2510 ; U1.39@3083.98,2545.32 3140.31,2545.31 3160,2565 3140.31,2584.69 U1.37@3083.98,2584.68 ; U1.29@3083.98,2742.17 3132.83,2742.17 v1(3150,2725) ; 3140,2545.31 3140,2510 ; v1(3145,2140) 3155,2130 X1.2@3207.68,2130 3207.68,2062.32 v1(3255,2015) ; v1(3160,2490) 3140,2510 ; U1.52@3178.46,2253.98 v1(3178.46,2310) ; U2.10@3334.84,2128.03 3334.8,2174.8 3316.3,2193.7 U1.59@3316.26,2253.98 3315,2255.2 3315,2320 3380,2385 3515,2385 3535,2385 v1(3544.79,2375.21) 3575,2345 3575,2256.82 U1.72@3572.17,2253.98 ; U2.10@3334.84,2128.03 3335,2127.87 v1(3335,2035) ; U1.14@3375.32,2876.02 3375.32,2919.68 3320,2975 3295,2975 3276.89,2956.89 U1.19@3276.88,2876.02 3276.89,2750 3246.89,2720 v1(3240,2720) 3260,2700 3370,2700 3513.11,2843.11 U1.7@3513.11,2876.02 ; U1.64@3414.69,2253.98 3414.69,2324.69 3426.39,2336.39 3475,2385 3485.56,2385 ; v1(3625,2530) 3640.31,2545.31 U1.87@3706.02,2545.32 ; v1(3625,3685) 3660,3720 v1(3717.3,3720) ; U1.93@3706.02,2663.42 3756.58,2663.42 3770,2650 v1(3780,2650) ; 3746.65,2427.2 U1.81@3706.02,2427.2 3767.2,2427.2 v1(3780,2440) ; U7.7@3799.76,2743.23 3822.99,2720 v1(3825,2720) ; C34.1@3830,1750.2 3830,1800 v1(3860,1830) ; v1(3845,2420) 3845,2360 3860,2345 U3.7@3900.98,2345 v1(4010,2345) ; v1(3915,3535) 3917.2,3532.8 IC1.4@3917.2,3465 ; U8.5@4038.4,2161 4038.41,2223.41 v1(4040,2225) ; R1.1@4156.78,2160 4215,2218.22 v1(4215,2225) ; v1(4180,2880) R51.1@4238.22,2880 ; v1(4215,1865) 4215,1800 4265,1750 4354.96,1750 USB.0@4407.79,1697.16 ; U10.47@4327.68,2361.42 4358.6,2361.4 4370,2350 v1(4370,2325) ; U10.45@4327.68,2400.79 4365.79,2400.79 v1(4375,2410) ; v1(4370,2690) 4260,2690 4238.22,2711.78 R52.1@4238.22,2760 4304.97,2826.75 4360.92,2882.7 C32.1@4365,2882.7 C30.2@4625,2882.7 ; USB.0@4386.15,1598.74 4386.15,1675.52 USB.0@4407.79,1697.16 ; USB.5@4468.82,1592.83 4468.83,1636.13 USB.0@4407.79,1697.16 ; U10.9@4544.21,2282.68 v1(4544.21,2460) ; v1(4558.61,3280) C37.1@4558.61,3352.3 ; U10.25@4603.27,2617.32 4603.27,2586 4564.81,2547.54 v1(4457.46,2547.54) 4426.1,2578.9 ; USB.0@4632.2,1697.16 4632.21,1620.38 USB.0@4653.86,1598.74 ; U10.18@4662.32,2440.16 v1(4705,2440.16) ; 4426.1,2578.9 U10.34@4426.1,2617.32 4426.1,2578.9
  Top Layer w19.84: TYPE-C.B12@1563.27,3837.16 1563.27,3750.75 1705,3750.75 TYPE-C.8@1705,4140.11 ; TYPE-C.A12@1563.27,4053.7 TYPE-C.7@1563.27,4140.11 TYPE-C.8@1705,4140.11 ; C23.1@1733.35,3101.04 1849.26,3101.04 R14.1@1855,3106.78 1956.78,3106.78 v1(2010,3160) ; U6.1@1913.19,4140.16 v1(1983.03,4210) ; U6.1@1913.19,4140.16 TYPE-C.8@1705,4140.11 ; v1(2520,3485) 2614.64,3579.64 C27.2@2625.12,3579.64 2625.11,3402.25 C26.1@2544.08,3321.22 ; C22.1@2544.08,4147.99 v1(2603.29,4147.99) R19.2@2659.38,4147.99 2721.39,4210 2954.51,4210 C29.1@3016.52,4147.99 3078.5,4210 3205.7,4210 C2.1@3267.7,4147.99 ; v1(2625,3945) C24.2@2625.87,3894.61 C27.2@2625.12,3579.64 ; 2625.11,3434.94 2625.11,3355.49 R17.1@2659.38,3321.22 ; C2.1@3267.7,4147.99 C7.1@3267.7,3321.22 C10.1@3402.93,3321.21 C15.1@3402.93,4147.98 C2.1@3267.7,4147.99
  Top Layer w20: v1(2965,3650) 3005.11,3609.89 C25.2@3005.12,3579.64 ; v1(2965,3965) 3005.11,3924.89 C28.2@3005.12,3894.61 ; v1(3335,3855) 3391.76,3911.76 C9.1@3402.93,3911.76 ; 3372.8,4147.99 3397.99,4147.99 3460,4210 3690.43,4210 RESET.2@3737.79,4162.64 SW4.2@4697.76,4162.64 ; 3631.1,4210 3631.1,3806.2 v1(3717.3,3720) ; IC1.4@3917.2,3465 4096.78,3465 R12.1@4105,3473.22 4225.92,3352.3 C35.1@4255.85,3352.3 C38.1@4710,3352.3
  Mid-Layer 1 w10: v1(3150,2725) 3235,2725 v1(3240,2720) ; v1(3780,2440) 3825,2440 v1(3845,2420) ; v1(4010,2345) 4040,2315 v1(4040,2225) ; v1(4180,2880) 4233.25,2826.75 v1@4304.97,2826.75 ; v1(4215,1865) v1(4215,2225) 4315,2325 v1(4370,2325) ; v1(4457.46,2547.54) 4564.84,2440.16 v1(4705,2440.16) 4794.84,2440.16 CN2.9@5070,2165
  Mid-Layer 2 w10: v1(2830,2405) 3075,2405 v1(3160,2490) ; v1(3178.46,2310) 3178.46,2471.54 v1(3160,2490) ; v1(3335,3320) 3150,3135 v1(3150,2725) 3105,2680 3105,2545 v1(3160,2490) ; v1(3625,2530) 3715,2440 v1(3780,2440) ; v1(3860,1830) 4180,1830 v1(4215,1865) ; v1(4040,2225) v1(4215,2225) ; v1(4370,2325) 4370,2405 v1(4375,2410) 4425,2460 v1(4544.21,2460) ; v1(4370,2690) 4370,2605 4427.5,2547.5 4432.5,2547.5 ; 4432.54,2547.54 v1(4457.46,2547.54)
  Mid-Layer 2 w20: v1(2965,3650) v1(2965,3965) ; 2965,3739.55 3080.45,3855 v1(3335,3855)
  Bottom Layer w10: v1(3145,2140) 3178.46,2173.46 v1(3178.46,2310) ; v1(3255,2015) 3275,2015 3295,1995 ; v1(3295,1940) 3295,1995 ; v1(3335,2035) 3295,1995 ; v1(3544.79,2375.21) 3625,2455.41 v1(3625,2530) ; v1(3625,3685) 3625,3610 3650,3585 3865,3585 v1(3915,3535) ; v1(3780,2440) 3825,2485 3825,2530 v1(3825,2720) ; v1(3780,2650) 3825,2695 ; USB.0@4407.79,1697.16 USB.0@4632.2,1697.16 ; v1(4558.61,3280) 4895,3280 CN1.9@5070,3105
  Bottom Layer w19.84: v1(1983.03,4210) 2010,4210 2541.3,4210 v1(2603.29,4147.99) 2625,4126.28 v1(2625,3945) ; v1(2010,3160) 2068.2,3218.2 2335,3485 v1(2520,3485)
  other v1: 3335,2035 4304.97,2826.75
IC1_2: IC1.2 R11.1 R12.2 | length 660
  Top Layer w10: IC1.2@3917.2,3365 v1(4010,3365) 4096.78,3365 R12.2@4105,3356.78 ; R11.1@3955,3619.78 3955,3600 v1(4010,3545)
  Top Layer w20: IC1.2@3917.2,3365 4096.78,3365 R12.2@4105,3356.78
  Bottom Layer w10: v1(4010,3365) v1(4010,3545)
  other v1: 4010,3365
IC1_5: C21.2 IC1.5 RESET.1 | length 1088.7
  Top Layer w10: IC1.5@3692.8,3465 3755,3465 3775,3485 3775,3625 3842.7,3692.7 C21.2@3842.7,3720 3842.7,3762.45 RESET.1@3737.79,3867.36
  Top Layer w20: IC1.5@3692.8,3465 3755,3465 3775,3485 3775,3625 3842.7,3692.7 C21.2@3842.7,3720 3842.7,3762.45 RESET.1@3737.79,3867.36
LED_1: R42.2 U1.54 | length 633.2
  Top Layer w10: R42.2@2833.22,1805 2868,1805 v1(2875.78,1805) ; v1(3217.84,2200.44) U1.54@3217.84,2253.98
  Bottom Layer w10: v1(2875.78,1805) 3217.84,2147.06 v1(3217.84,2200.44)
LED_2: R41.2 U1.53 | length 693.1
  Top Layer w10: R41.2@2830.03,1917.3 2795.25,1917.3 2791.5,1921.05 2791.5,2065.68 2841.9,2116.08 2902.73,2116.08 2974.93,2188.28 3172.99,2188.28 3198.15,2213.44 U1.53@3198.15,2253.98
POWER_2: POWER.2 R15.2 | length 241
  Top Layer w10: R15.2@2068.22,3160 2070.76,3160 POWER.2@2187.46,3160 POWER.2@2190,3160
  Top Layer w19.84: R15.2@2070.76,3160 POWER.2@2190,3160
R18_1: 7SEG1.10 R18.1 | length 118.9
  Top Layer w10: 7SEG1.10@1615,2671.98 R18.1@1615,2790.92
R20_1: 7SEG1.9 R20.1 | length 134
  Top Layer w10: 7SEG1.9@1715,2671.98 1751.43,2708.41 R20.1@1751.43,2790.92
R21_1: 7SEG1.7 R21.1 | length 130.2
  Top Layer w10: R21.1@1887.86,2790.92 1887.86,2699.12 7SEG1.7@1915,2671.98
R22_1: 7SEG1.6 R22.1 | length 122.8
  Top Layer w10: 7SEG1.6@2015,2671.98 2024.29,2681.27 R22.1@2024.29,2790.92
R23_2: 7SEG1.1 R23.2 | length 119
  Top Layer w10: R23.2@1615,1804.99 7SEG1.1@1615,1923.96
R24_2: 7SEG1.2 R24.2 | length 134.1
  Top Layer w10: 7SEG1.2@1715,1923.96 1751.43,1887.53 R24.2@1751.43,1804.99
R25_2: 7SEG1.4 R25.2 | length 130.2
  Top Layer w10: R25.2@1887.86,1804.99 1887.86,1896.82 7SEG1.4@1915,1923.96
R26_2: 7SEG1.5 R26.2 | length 122.8
  Top Layer w10: 7SEG1.5@2015,1923.95 2024.29,1914.66 R26.2@2024.29,1804.99
R27_2: 7SEG2.1 R27.2 | length 122.8
  Top Layer w10: R27.2@2160.71,1804.99 2160.71,1914.66 7SEG2.1@2170,1923.95
R28_2: 7SEG2.2 R28.2 | length 130.2
  Top Layer w10: 7SEG2.2@2270,1923.95 2297.14,1896.81 R28.2@2297.14,1804.99
R29_2: 7SEG2.4 R29.2 | length 134
  Top Layer w10: R29.2@2433.57,1804.99 2433.57,1887.52 7SEG2.4@2470,1923.95
R30_2: 7SEG2.5 R30.2 | length 118.9
  Top Layer w10: R30.2@2570,1804.99 7SEG2.5@2570,1923.94
R31_1: 7SEG2.10 R31.1 | length 122.8
  Top Layer w10: R31.1@2160.71,2790.92 2160.71,2681.26 7SEG2.10@2170,2671.97
R32_1: 7SEG2.9 R32.1 | length 130.2
  Top Layer w10: 7SEG2.9@2270,2671.97 2297.14,2699.11 R32.1@2297.14,2790.92
R33_1: 7SEG2.7 R33.1 | length 134
  Top Layer w10: R33.1@2433.57,2790.92 2433.57,2708.4 7SEG2.7@2470,2671.97
R34_1: 7SEG2.6 R34.1 | length 119
  Top Layer w10: 7SEG2.6@2570,2671.97 R34.1@2570,2790.92
R35_1: R35.1 USB.2 | length 326.5
  Top Layer w10: USB.2@4545.6,1592.83 4545.6,1807.6 4600,1862 R35.1@4600,1896.78
R35_2: R35.2 U10.8 | length 317.3
  Top Layer w10: U10.8@4524.53,2282.68 4524.53,2252.23 4534.67,2242.09 4544.48,2242.09 4613.05,2173.52 4613.05,2061.05 4600,2048 R35.2@4600,2013.22
R36_1: R36.1 USB.3 | length 332.1
  Top Layer w10: R36.1@4440,1891.78 4440,1857 4520.01,1776.99 USB.3@4520,1592.83
R36_2: R36.2 R37.1 U10.7 | length 321.7
  Top Layer w10: R36.2@4440,2008.22 4440,2043 4461.78,2064.78 R37.1@4461.78,2135 4496.56,2135 4504.84,2143.28 U10.7@4504.84,2282.68
R37_2: R37.2 U10.5 | length 625.8
  Top Layer w10: U10.5@4465.47,2282.68 4465.47,2235.43 4395.46,2165.42 4395.46,1976.3 4398.37,1973.39 4484.02,1973.39 4578.22,2067.59 R37.2@4578.22,2135
R39_1: R39.1 R40.1 U8.4 | length 434.1
  Top Layer w10: R40.1@3843.22,2162.5 R39.1@3843.22,2040 3878,2040 v1(3886.11,2048.11) ; U8.4@4038.4,1909 4063.96,1909 v1(4065.5,1907.46)
  Mid-Layer 1 w10: v1(3886.11,2048.11) 4026.76,1907.46 v1(4065.5,1907.46)
R41_1: LED2.1 R41.1 | length 111.5
  Top Layer w10: R41.1@2713.59,1917.3 2713.59,1961.79 2715.26,1963.46 LED2.1@2715.26,2028.06
R42_1: LED1.1 R42.1 | length 112.6
  Top Layer w10: LED1.1@2715.26,1693.06 2715.26,1758.99 2716.78,1760.51 R42.1@2716.78,1805
R44_1: R44.1 R45.1 SW2.2 | length 761.1
  Top Layer w10: SW2.2@4233.78,3867.36 4364.93,3736.21 R44.1@4408.75,3736.21 R45.1@4560,3736.21
  Top Layer w20: SW2.2@4233.78,3867.36 4364.93,3736.21 R44.1@4408.75,3736.21 R45.1@4560,3736.21
R48_1: R46.1 R48.1 SW3.2 | length 870
  Top Layer w10: SW3.2@4481.77,3867.36 4532.6,3867.4 4663.8,3736.2 R46.1@4711.25,3736.21 ; R46.1@4711.25,3736.21 R48.1@4862.49,3736.21
  Top Layer w20: SW3.2@4481.77,3867.36 4532.6,3867.4 4663.8,3736.2 R46.1@4711.25,3736.21 ; R46.1@4711.25,3736.21 R48.1@4862.49,3736.21
R49_1: R49.1 R50.2 SW4.1 | length 979.1
  Top Layer w10: SW4.1@4729.76,3867.36 4822.64,3867.36 4953.79,3736.21 5013.75,3736.21 R50.2@5165,3736.21
  Top Layer w20: SW4.1@4729.76,3867.36 4822.64,3867.36 4953.79,3736.21 R49.1@5013.75,3736.21 R50.2@5165,3736.21
RESET: IC1.6 R10.1 U1.85 | length 1754.6
  Top Layer w10: v1(3590,2530) 3614.06,2505.94 U1.85@3706.02,2505.94 ; R10.1@3721.78,3585 3650,3585 3625,3560 3625,3445 3651.79,3418.21 3655,3415 IC1.6@3692.8,3415 v1(3755,3415)
  Top Layer w20: IC1.6@3692.8,3415 3655,3415 3625,3445 3625,3560 3650,3585 R10.1@3721.78,3585
  Mid-Layer 1 w10: v1(3755,3415) 3765,3405 v1(3765,3040)
  Mid-Layer 2 w10: v1(3590,2530) 3710,2650 3710,2755 3765,2810 v1(3765,3040)
RX: U1.70 U10.40 | length 1197.1
  Top Layer w10: U1.70@3532.8,2253.98 3532.8,2213.44 3532.85,2213.39 3566.04,2213.39 v1(3586.51,2192.92) ; v1(4215,2440) 4215,2495.69 4294.56,2575.25 4361.85,2575.25 4369.75,2567.35 4369.75,2512.03 4356.93,2499.21 U10.40@4327.68,2499.21
  Mid-Layer 1 w10: v1(3586.51,2192.92) 3672.92,2192.92 3930,2450 4215,2450 v1(4215,2440)
S$21989: 
S$25006: 
S$25016: 
S$25023: 
S$301442: 
S$323973: 
S$323990: 
S$324081: 
S$324085: 
S$325221: 
S$325300: 
S$325304: 
S$325308: 
S$325398: 
S$325420: 
S$325424: 
S$325428: 
S$326524: 
S$326531: 
S$326535: 
S$326614: 
S$326618: 
S$326622: 
S$326626: 
S$327107: 
SW0_1: C22.2 C24.1 SW0.1 SW0.4 U4.3 U5.3 U6.3 | length 4568.3
  Top Layer w10: U5.3@1913.19,3329.92 1771.97,3329.93 SW0.1@1747.88,3354.02 SW0.4@1747.88,3605.98 ; U4.3@1913.19,3644.88 1786.78,3644.89 1785,3643.11 ; U6.3@1913.19,3959.84 1978.43,3894.6 C24.1@2415.63,3894.61 ; C22.2@2418.68,4147.99 2417,4148 2355,4210 2050,4210 2005,4165 2005,4051.7 U6.3@1913.19,3959.84 1874.8,3959.8 1785,3870 1785,3643.11 ; SW0.4@1747.88,3605.98 1785,3643.1 ; SW0.4@1747.88,3605.98 1785,3643.11
  Top Layer w19.84: U5.3@1913.19,3329.92 1771.97,3329.93 SW0.1@1747.88,3354.02 SW0.4@1747.88,3605.98 ; U4.3@1913.19,3644.88 1786.78,3644.89 SW0.4@1747.88,3605.98 ; U6.3@1913.19,3959.84 1978.43,3894.6 C24.1@2415.63,3894.61 ; C22.2@2418.68,4147.99 2417,4148 2355,4210 2050,4210 2005,4165 2005,4051.7 U6.3@1913.19,3959.84 1874.8,3959.8 1785,3870 1785,3643.1 SW0.4@1747.88,3605.98
SW0_3: SW0.3 SW0.6 TYPE-C.A9 TYPE-C.B9 | length 1725.7
  Top Layer w10: TYPE-C.B9@1563.27,3885.59 1600.59,3885.59 v1(1660,3945) 1599.73,4005.27 TYPE-C.A9@1563.27,4005.27 ; SW0.3@1590.39,3354.02 SW0.6@1590.39,3605.98 1590.4,3665.4 v1(1630,3705)
  Top Layer w19.84: TYPE-C.B9@1563.27,3885.59 1600.59,3885.59 v1(1660,3945) 1599.73,4005.27 TYPE-C.A9@1563.27,4005.27 ; SW0.3@1590.39,3354.02 SW0.6@1590.39,3605.98 1590.39,3665.39 v1(1630,3705)
  Bottom Layer w10: v1(1630,3705) 1630,3915 v1(1660,3945)
  Bottom Layer w19.84: v1(1630,3705) 1630,3915 v1(1660,3945)
  other v1: 1630,3705 1660,3945 1660,3945